# Altium PCB PCB1.PcbDoc
Units mm, origin at the board's own origin, x right, y up, seen from the top; angles counter-clockwise.
Board outline 79.25 x 62 mm, 4 copper layers (L1(signal), l2(GND), l3(GND), L4(signal)), stack 1.57 mm thick; 47 components, 30 nets, 186 pads, 68 vias.
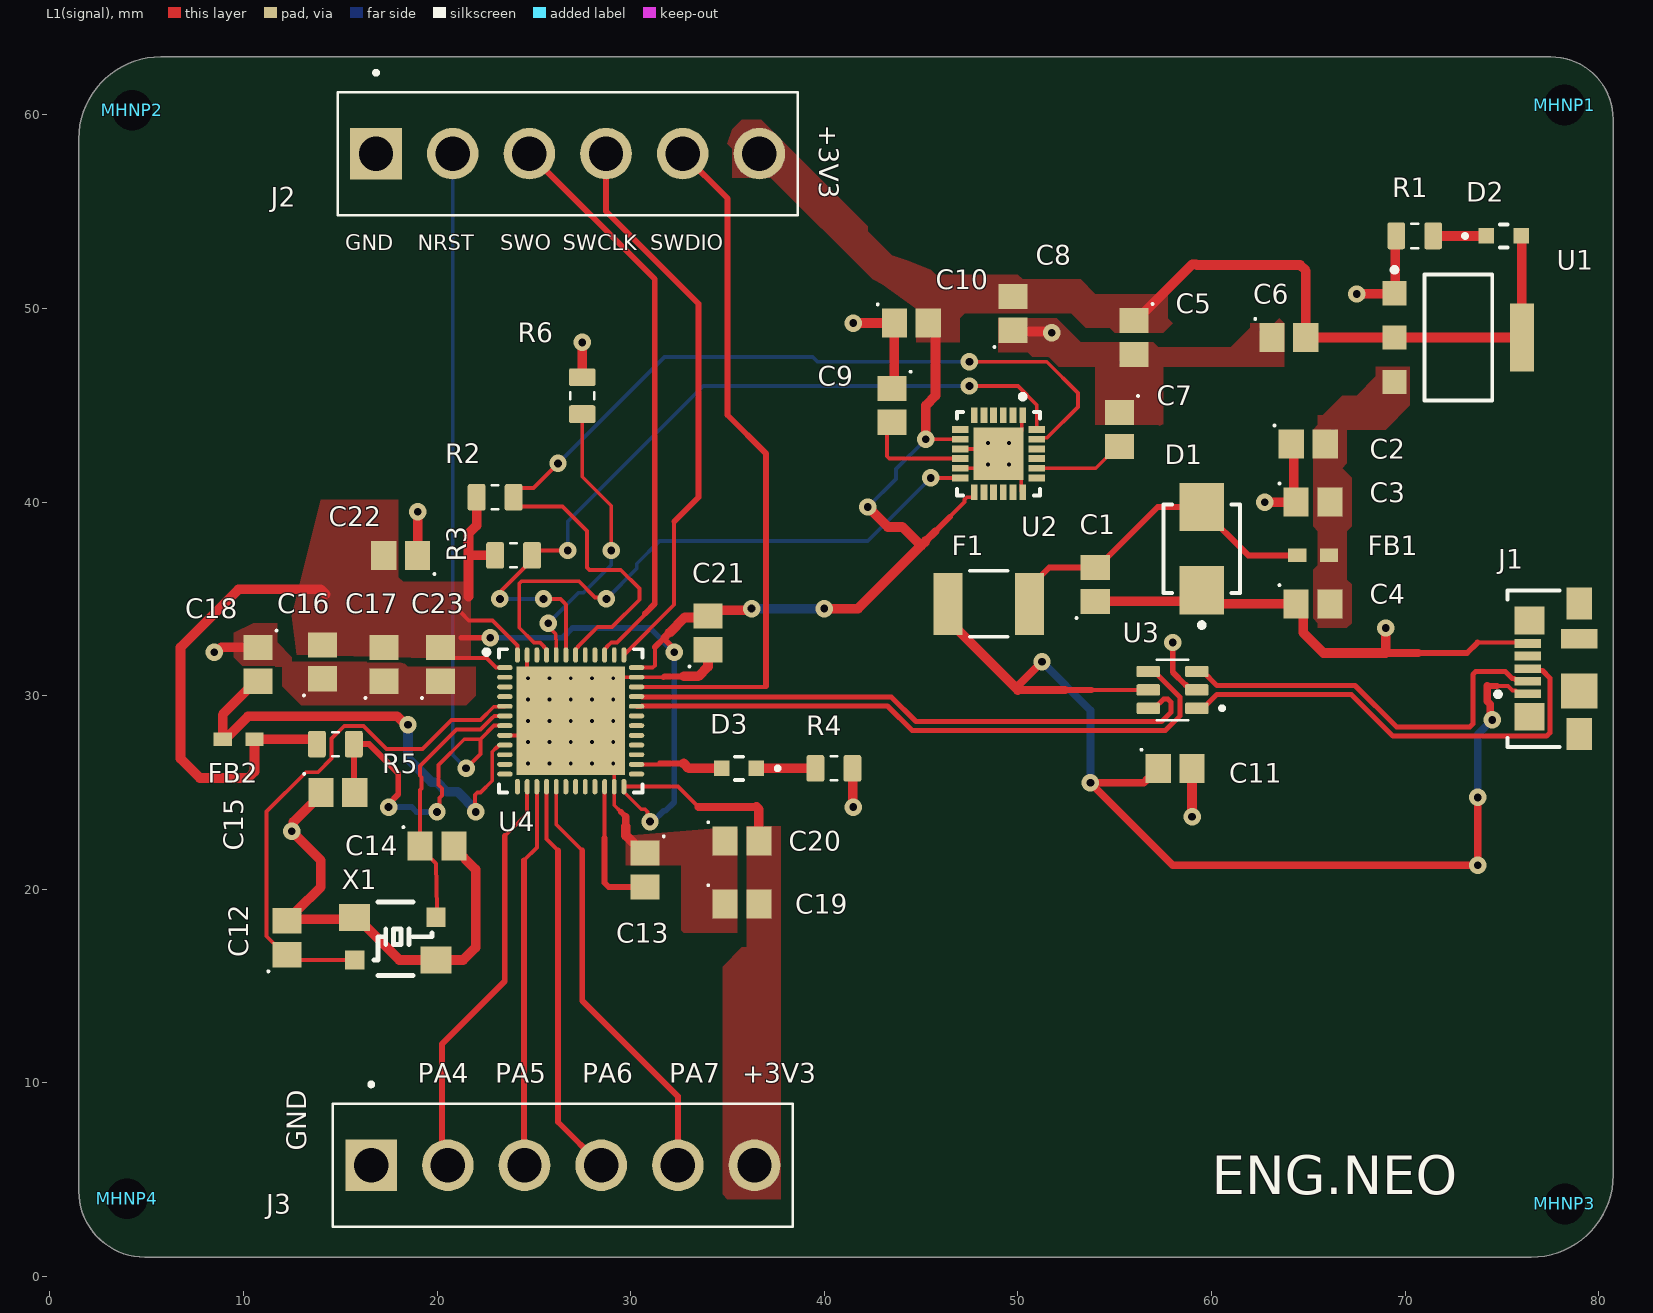
[diagram p0: L1(signal) view]
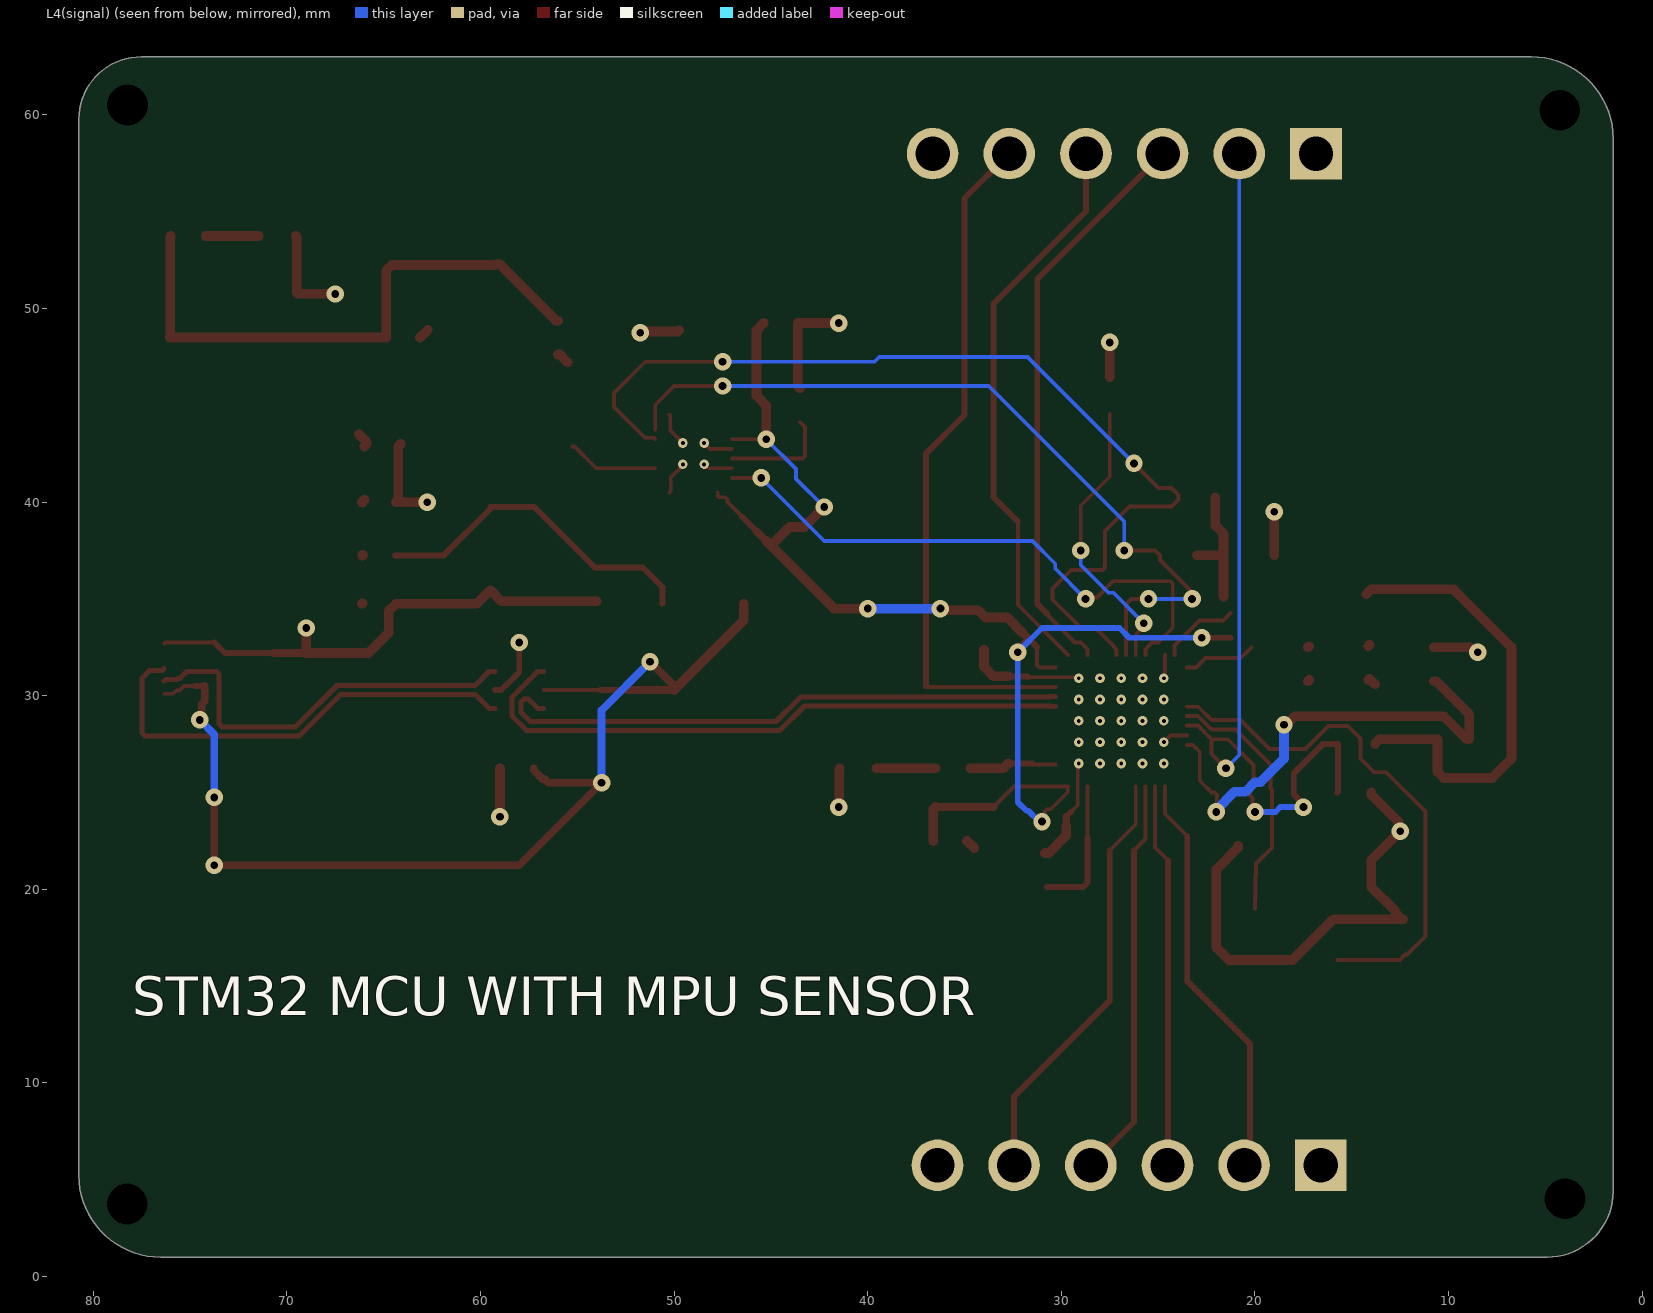
[diagram p1: L4(signal) view, seen from below]
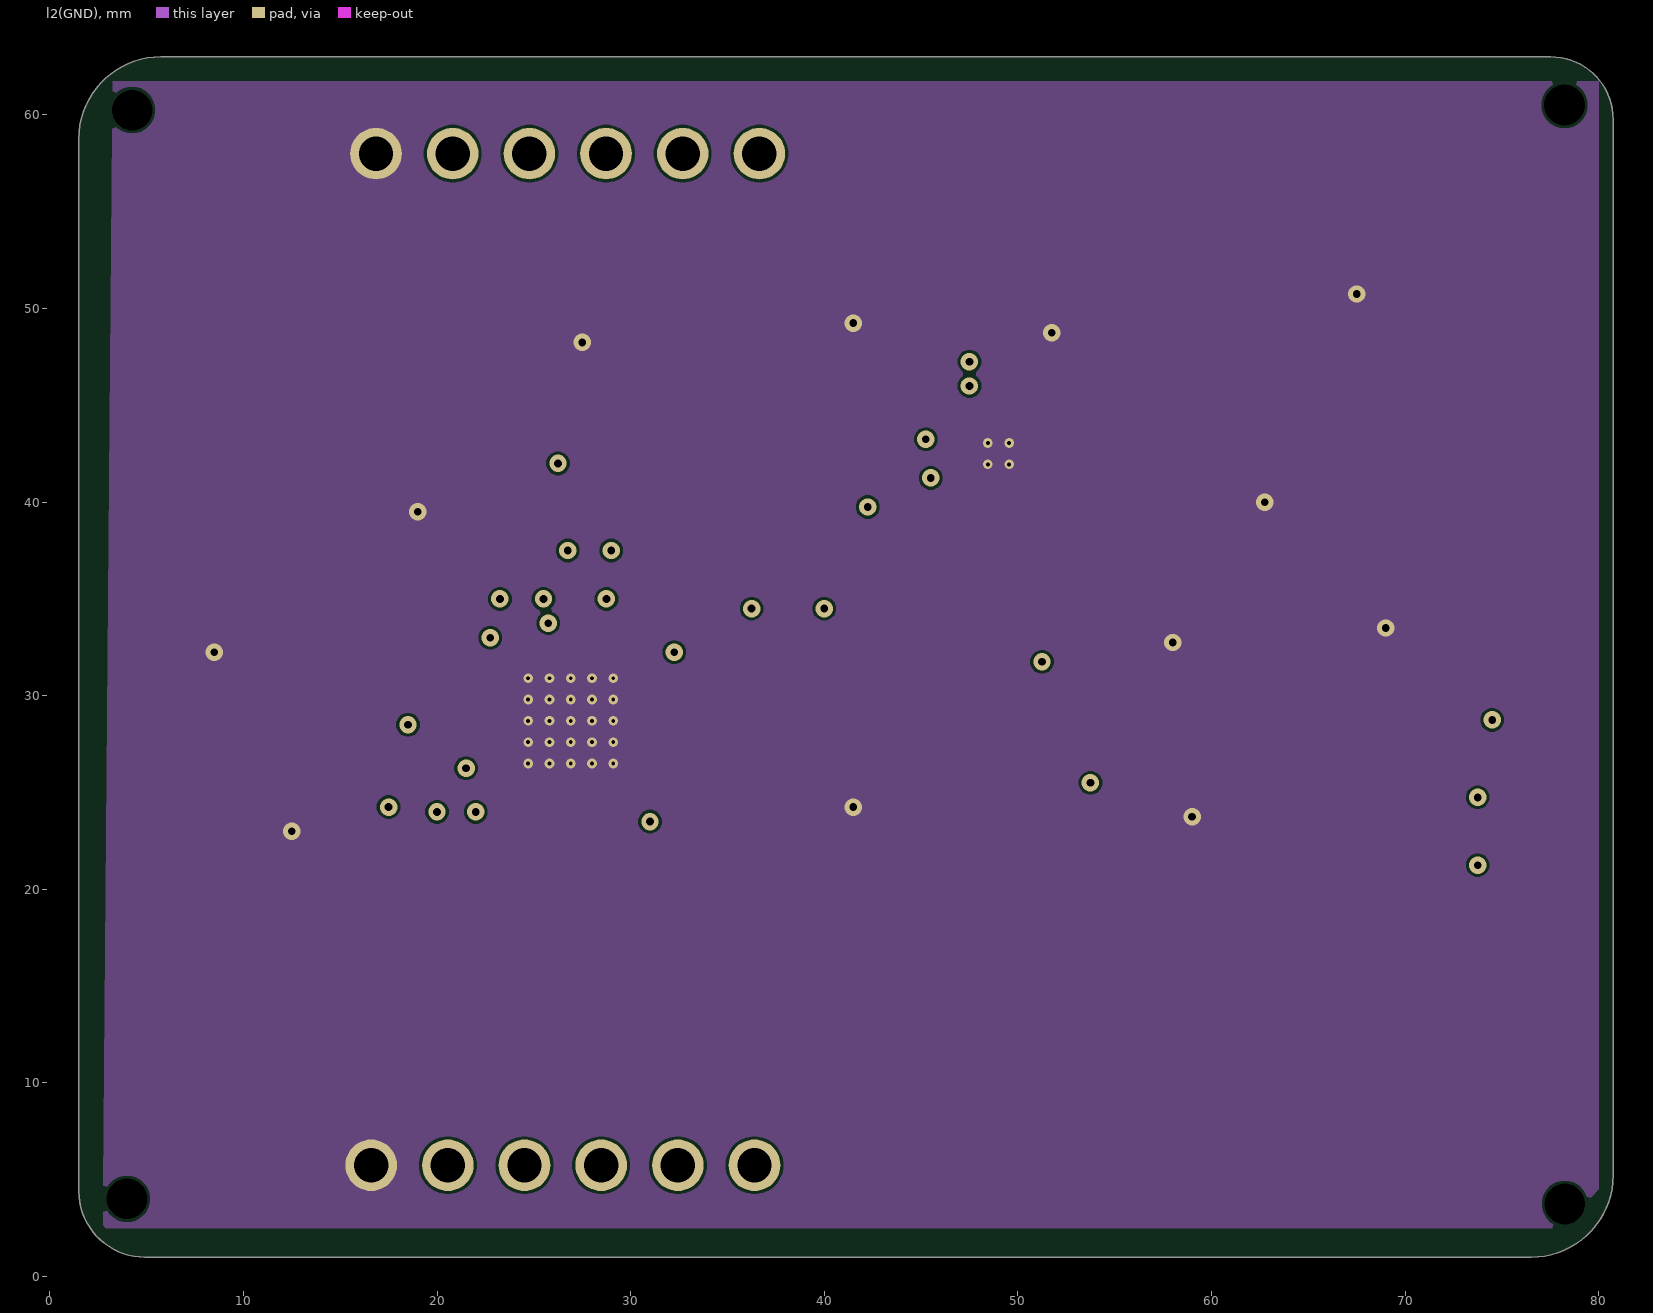
[diagram p2: l2(GND)]
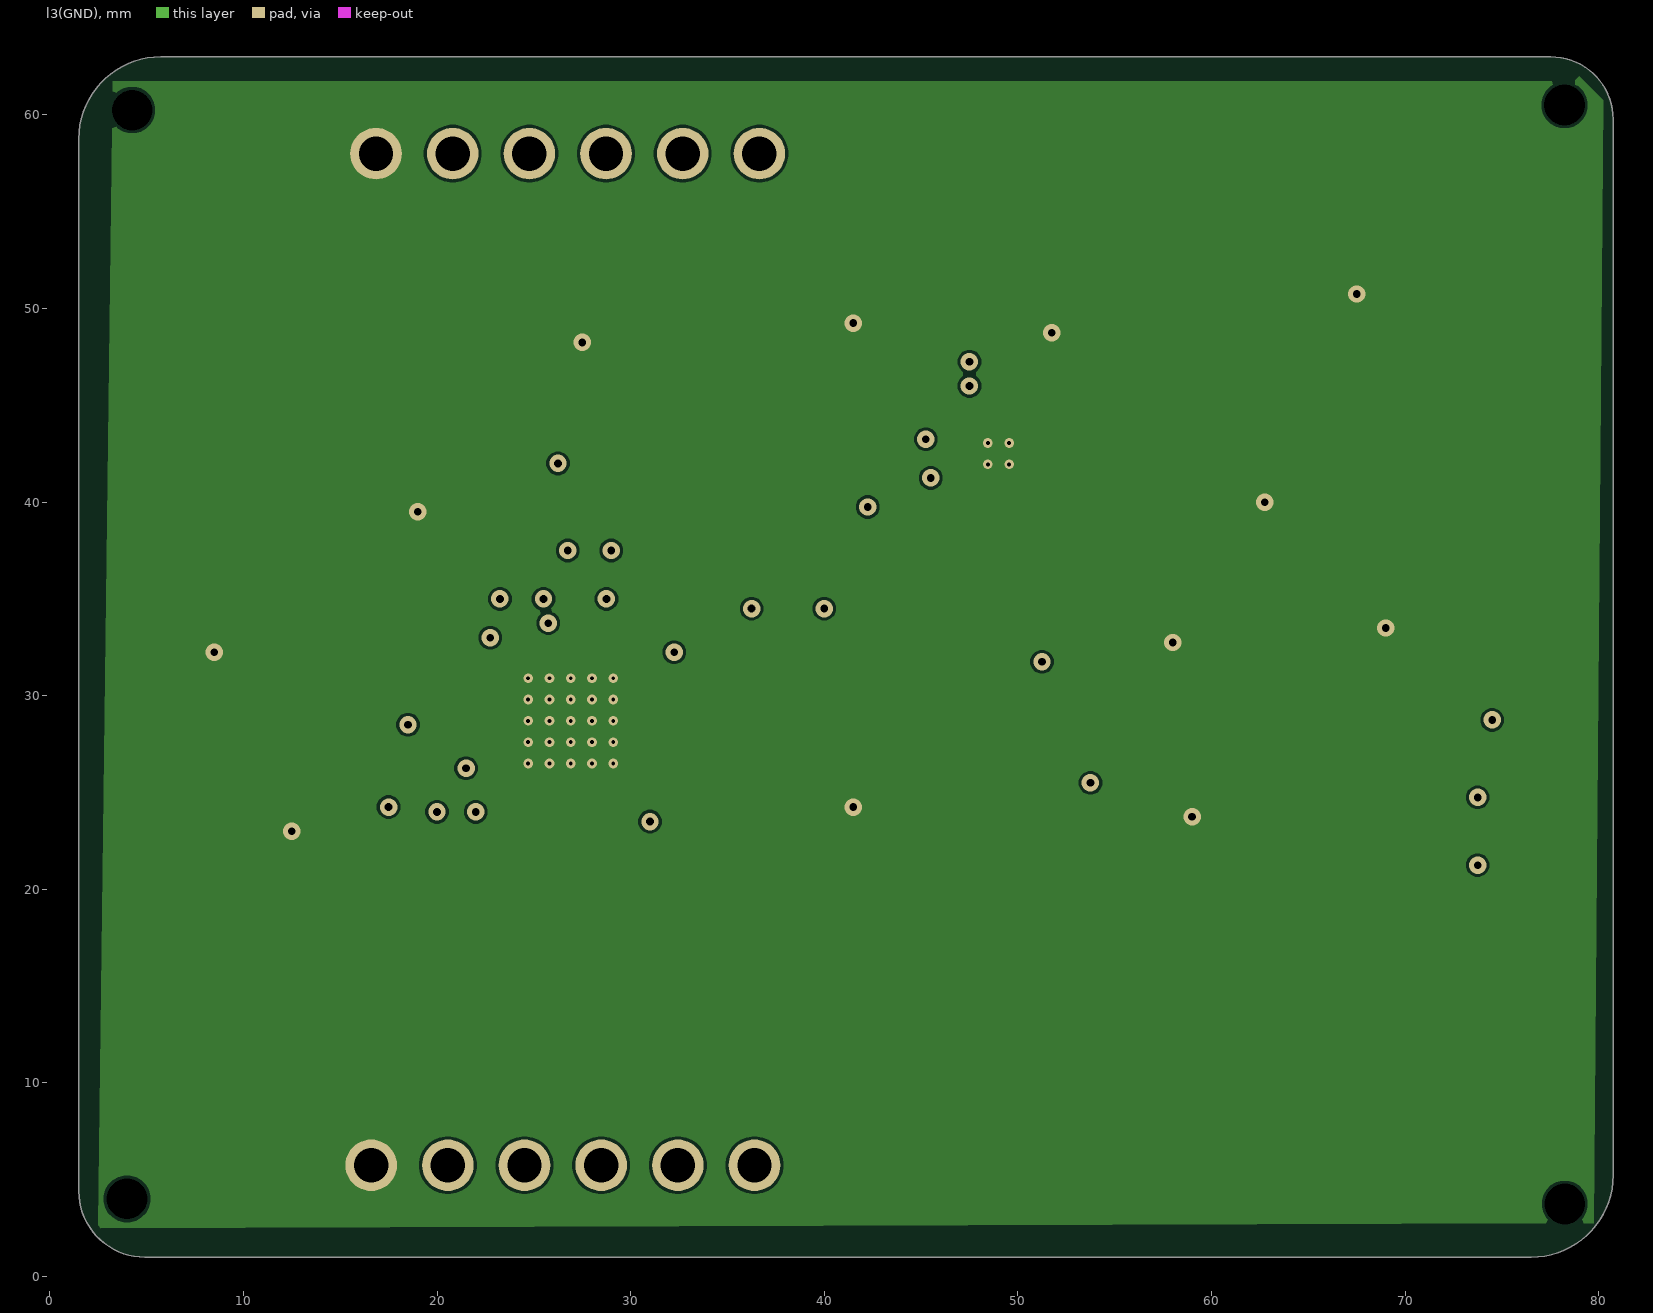
[diagram p3: l3(GND)]
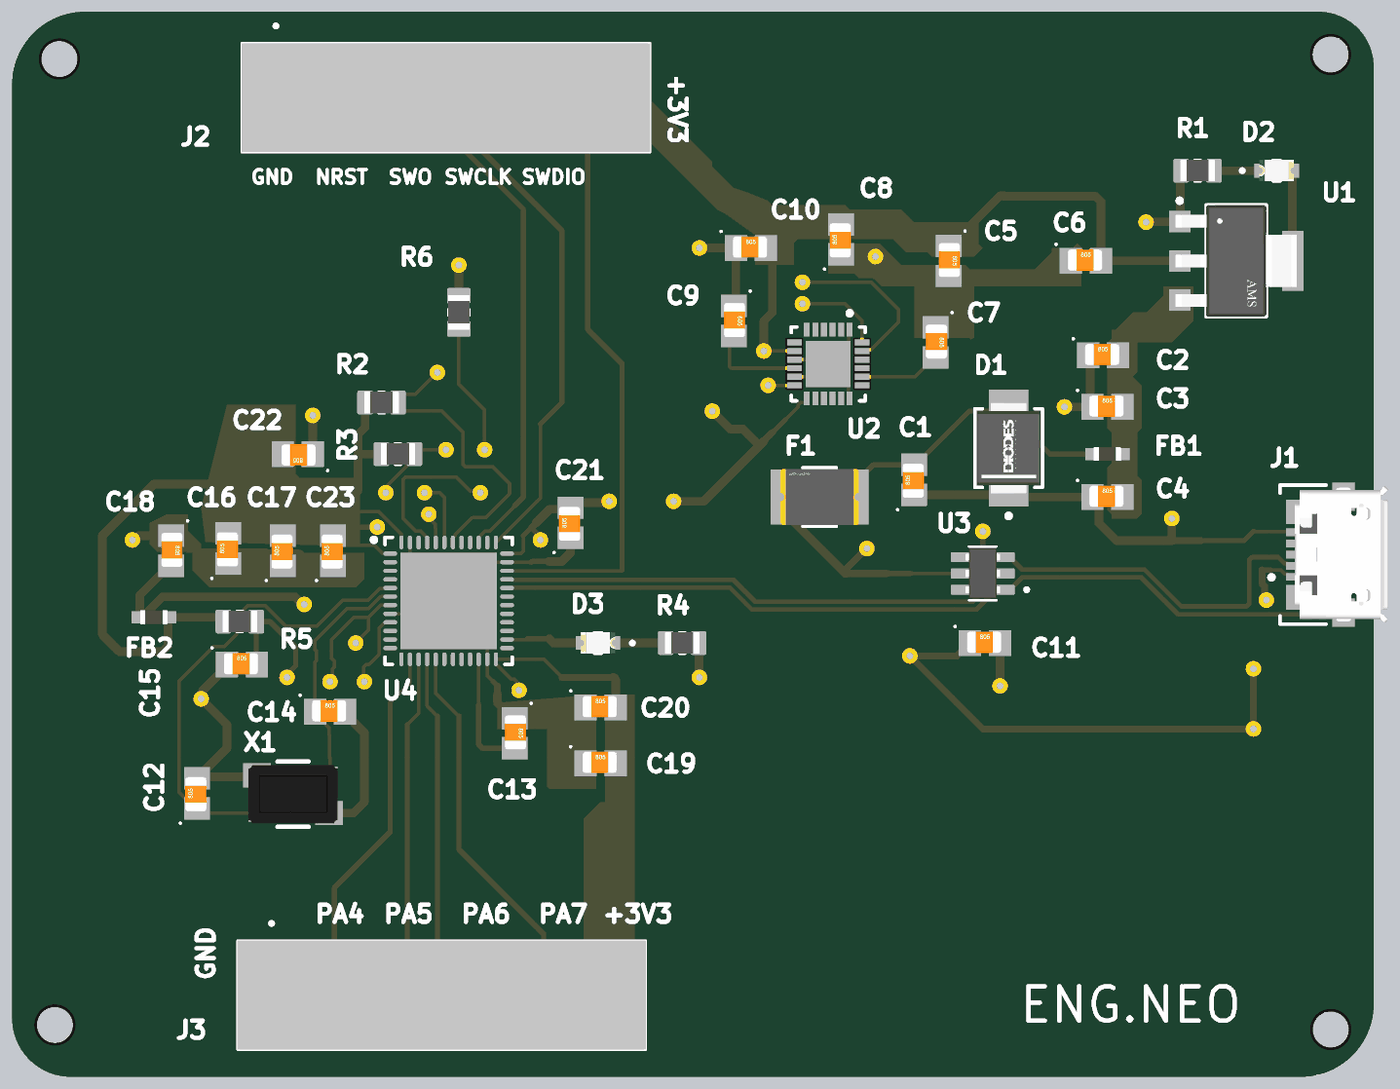
[diagram p4: 3D render of the assembled board from above, using the file's embedded part models]

## Layer stack, top to bottom
Top Solder: solder mask 0.0254, SM-001, Dk 4
L1(signal): signal copper 0.035
Dielectric 1: prepreg 0.2, PP-017, Dk 4.6
l2(GND): signal copper 0.0175
Dielectric 3: core 1.065, Core-039, Dk 4.6
l3(GND): signal copper 0.0175
Dielectric 5: prepreg 0.2, PP-017, Dk 4.6
L4(signal): signal copper 0.035
Bottom Solder: solder mask 0.0254, SM-001, Dk 4

## Board outline
1.5,4.414 ccw(c4.914,4.414) 4.914,1 5.75,1 76.518,1 ccw(c76.518,5.232) 80.75,5.232 80.75,59.775 ccw(c77.525,59.775) 77.525,63 5.732,63 ccw(c5.732,58.768) 1.5,58.768

## Design rules (kind name [scope] priority, off if disabled: settings)
Clearance [All] p1: gap=0.15 ignorepadtopadclearanceinfootprint=TRUE
DiffPairsRouting [All] p1: maxlimit=0.254 minlimit=0.203 mostfreqgap=0.254 toplayer_maxgap=0.203 toplayer_prefgap=0.203 toplayer_minwidth=0.26 toplayer_maxwidth=0.26 toplayer_prefwidth=0.26 bottomlayer_maxgap=0.203 bottomlayer_prefgap=0.203 bottomlayer_minwidth=0.26 bottomlayer_maxwidth=0.26 bottomlayer_prefwidth=0.26 impedanceprofiledriven=TRUE impedanceprofileid={50B02AB9-6795-4134-819A-C436B6F8A8B1} impedanceprofilevalue=90.000000 maxuncoupledlength=12.7
MinimumSolderMaskSliver [All] p1: minsoldermaskwidth=0.1
PolygonConnect [All] p1: connectstyle=Direct reliefconductorwidth=0.254 reliefentries=4 polygonreliefangle="90 Angle" airgapwidth=0.254
RoutingVias [All] p1: holewidth=0.3 width=0.7 viastyle="Through Hole" minholewidth=0.25 minwidth=0.55 maxholewidth=0.4 maxwidth=0.9
SMDNeckDown [All] p1: percent=80.000
SilkToSolderMaskClearance [IsPad] p1: minsilkscreentomaskgap=0.15 clearancetoexposedcopper=TRUE
SolderMaskExpansion [All] p1: expansion=0 istentingtop=FALSE
SupplyNets "Schematic Supply Nets_4" [InNet('VBUS')] p1: voltage=0.000
SupplyNets "Schematic Supply Nets_3" [InNet('+3V3')] p2: voltage=0.000
SupplyNets "Schematic Supply Nets_2" [InNet('+5V')] p3: voltage=0.000
SupplyNets "Schematic Supply Nets_1" [InNet('GND')] p4: voltage=0.000
SupplyNets "Schematic Supply Nets" [InNet('+3V3A')] p5: voltage=0.000
UnRoutedNet [All] p1: checkbadconnections=TRUE
Width [All] p1: maxlimit=1 minlimit=0.2 preferedwidth=0.3
26 further rules are at their usual default settings.

## Classes and differential pairs
differential pair class DIFF_USB_IN: USB_IN USB_OUT
differential pair USB_OUT: +USB_OUT_P -USB_OUT_N
differential pair USB_IN: +USB_IN_P -USB_IN_N

## Components (designator, comment, footprint, x,y, rotation, side; value= is the part's Value field where it differs from the comment)
C1 "100nF Ceramic Multilayer Capacitor_1" CAPCP2012X09N 54,35.75 r90 top
C2 "100nF Ceramic Multilayer Capacitor_1" CAPCP2012X09N 65,43 r0 top
C3 "100nF Ceramic Multilayer Capacitor_1" CAPCP2012X09N 65.25,40 r0 top
C4 "100nF Ceramic Multilayer Capacitor_1" CAPCP2012X09N 65.25,34.75 r0 top
C5 "100nF Ceramic Multilayer Capacitor_1" CAPCP2012X09N 56,48.5 r270 top
C6 "100nF Ceramic Multilayer Capacitor_1" CAPCP2012X09N 64,48.5 r0 top
C7 "100nF Ceramic Multilayer Capacitor_1" CAPCP2012X09N 55.25,43.75 r270 top
C8 "100nF Ceramic Multilayer Capacitor_1" CAPCP2012X09N 49.75,49.75 r90 top
C9 "100nF Ceramic Multilayer Capacitor_1" CAPCP2012X09N 43.5,45 r270 top
C10 "100nF Ceramic Multilayer Capacitor_1" CAPCP2012X09N 44.5,49.25 r0 top
C11 "100nF Ceramic Multilayer Capacitor_1" CAPCP2012X09N 58.125,26.25 r0 top
C12 "100nF Ceramic Multilayer Capacitor_1" CAPCP2012X09N 12.25,17.5 r90 top
C13 "100nF Ceramic Multilayer Capacitor_1" CAPCP2012X09N 30.75,21 r270 top
C14 "100nF Ceramic Multilayer Capacitor_1" CAPCP2012X09N 20,22.25 r0 top
C15 "100nF Ceramic Multilayer Capacitor_1" CAPCP2012X09N 14.875,25 r0 top
C16 "100nF Ceramic Multilayer Capacitor_1" CAPCP2012X09N 14.087,31.752 r90 top
C17 "100nF Ceramic Multilayer Capacitor_1" CAPCP2012X09N 17.262,31.625 r90 top
C18 "100nF Ceramic Multilayer Capacitor_1" CAPCP2012X09N 10.75,31.625 r270 top
C19 "100nF Ceramic Multilayer Capacitor_1" CAPCP2012X09N 35.75,19.25 r0 top
C20 "100nF Ceramic Multilayer Capacitor_1" CAPCP2012X09N 35.75,22.5 r0 top
C21 "100nF Ceramic Multilayer Capacitor_1" CAPCP2012X09N 34,33.25 r90 top
C22 "100nF Ceramic Multilayer Capacitor_1" CAPCP2012X09N 18.125,37.25 r180 top
C23 "100nF Ceramic Multilayer Capacitor_1" CAPCP2012X09N 20.183,31.625 r90 top
D1 "SMBJ5.0A-13-F" FP-SMB-MFG 59.5,37.6 r90 top
D2 "GREEN" LEDC2012X70N 75.1,53.75 r0 top
D3 "GREEN" LEDC2012X70N 35.6,26.25 r180 top
F1 "MF-MSMF050-2" FP-MF-MSMF050-2-MFG 48.5,34.75 r0 top value=0.15-1Ω
FB1 "120R" "WE-CBF HF_0603_HC" 65.25,37.25 r0 top
FB2 "120R" "WE-CBF HF_0603_HC" 9.75,27.75 r180 top
J1 "473460001" FP-473460001-MFG 78.65,31.4 r90 top
J2 "640383-6" TE_640383-6 26.75,58 r0 top
J3 "640383-6" TE_640383-6 26.5,5.75 r0 top
MHNP1 "Mounting hole non plated 3.2mm" MHNP3P2MM 78.25,60.5 r90 top
MHNP2 "Mounting hole non plated 3.2mm" MHNP3P2MM 4.261,60.239 r90 top
MHNP3 "Mounting hole non plated 3.2mm" MHNP3P2MM 78.261,3.739 r90 top
MHNP4 "Mounting hole non plated 3.2mm" MHNP3P2MM 4,4 r90 top
R1 "1k" RESC2012X60N 70.5,53.75 r180 top
R2 "2k2" RESC2012X60N 23,40.25 r180 top
R3 "2k2" RESC2012X60N 23.955,37.25 r180 top
R4 "1k" RESC2012X60N 40.5,26.25 r0 top
R5 "10k" RESC2012X60N 14.75,27.5 r180 top
R6 "10k" RESC2012X60N 27.5,45.5 r270 top
U1 "AMS1117-3.3" FP-AMS1117-IPC_C 72.75,48.5 r0 top
U2 "MPU-6050" IS-QFN-24_V 49,42.5 r270 top
U3 "USBLC6-2SC6" SOT95P280X145-6N 57.995,30.3 r180 top
U4 "STM32F411CEU6" STM-UFQFPN48_L 26.906,28.704 r0 top
X1 "Aker 16MHz Crystal SMT" "Aker S5C Crystal" 15.75,16.35 r180 top value=24MHz

## Footprints (in the part's own frame and the unit in brackets; to place one, negate y for a bottom-side part, rotate by r counter-clockwise, add the part's x,y. Pads: shape width x height; smd on the part's side, far side on the other; paste and mask are expansions set on the pad)
"Aker S5C Crystal" [mm]
  rect 1x1 smd: 1(0,0) 4(-4.2,-2.2)
  rect 1.6x1.4 smd: 2(-4.2,0) 3(0,-2.2)
  round 0.254 on Top Overlay: 5(-3,-2.4)
  silkscreen extent -4,-3 -1,0.8, body extent -4.7,-2.8 0.5,0.6, height 1
CAPCP2012X09N [mm] "Chip Capacitor, 2-Leads, Body 2.00x1.25mm, IPC Medium Density"
  rect 1.3x1.5 smd: 1(-0.875,0) 2(0.875,0)
  silkscreen extent -1.79,0.91 -1.69,1.01, body extent -1.05,-0.57 0.95,0.68, height 0.78
FP-473460001-MFG [mm]
  rect 0.45x1.38 smd paste+0 mask+0: 1(-1.3,2.31) 2(-0.65,2.31) 3(0,2.31) 4(0.65,2.31) 5(1.3,2.31)
  rect 1.425x1.55 smd paste+0 mask+0: 6(-2.488,2.225) 7(2.487,2.225)
  rect 1.65x1.3 smd paste+0 mask+0: 8(-3.375,-0.35) 11(3.375,-0.35)
  rect 1.8x1.9 smd paste+0 mask+0: 9(-1.15,-0.35)
  rect 1x1.9 smd paste+0 mask+0: 10(1.55,-0.35)
  silkscreen extent -4.04,0.68 4.05,3.97, body extent -4.3,-2.48 4.3,3.45, height 0.25
FP-AMS1117-IPC_C [mm]
  rect 1.25x1.25 smd paste+0 mask+0: 1(-3.295,2.29) 2(-3.295,0) 3(-3.295,-2.29)
  rect 1.25x3.5 smd paste+0 mask+0: 4(3.295,0)
  silkscreen extent -3.42,-3.25 1.75,3.62, body extent -3.9,-3.35 3.9,3.35, height 0.25
FP-MF-MSMF050-2-MFG [mm]
  rect 1.5x3.2 smd paste+0 mask+0: 1(-2.1,0) 2(2.1,0)
  silkscreen extent -0.97,-1.7 0.97,1.71, body extent -2.95,-1.81 2.95,1.81, height 0.25
FP-SMB-MFG [mm]
  rect 2.5x2.3 smd paste+0 mask+0: 1(-2.15,0) 2(2.15,0)
  silkscreen extent -4.07,-1.97 2.28,1.97, body extent -3.5,-2.07 3.5,2.07, height 0.25
IS-QFN-24_V [mm] "QFN, 24-Leads, Body 4x4mm, Pitch 0.5mm, Thermal Pad 2.7x2.6mm"
  rect 0.8x0.35 smd: 1(-2,1.25) 2(-2,0.75) 3(-2,0.25) 4(-2,-0.25) 5(-2,-0.75) 6(-2,-1.25) 13(2,-1.25) 14(2,-0.75) 15(2,-0.25) 16(2,0.25) 17(2,0.75) 18(2,1.25)
  rect 0.35x0.85 smd mask+0.102: 7(-1.25,-1.975) 8(-0.75,-1.975) 9(-0.25,-1.975) 10(0.25,-1.975) 11(0.75,-1.975) 12(1.25,-1.975) 19(1.25,1.975) 20(0.75,1.975) 21(0.25,1.975) 22(-0.25,1.975) 23(-0.75,1.975) 24(-1.25,1.975)
  rect 2.7x2.6 smd: 25(0,0)
  silkscreen extent -3.07,-2.15 2.15,2.15, body extent -2,-2 2,2, height 0.95
LEDC2012X70N [mm]
  rect 0.8x0.8 smd: A(0.9,0) C(-0.9,0)
  silkscreen extent -2.1,-0.6 0.2,0.6, body extent -1,-0.63 1,0.63, height 0.7
MHNP3P2MM [mm] "Mounting hole non plated 3.2mm"
  round 0 hole 2.1 unplated mask+1.2: MHNP3P2MM(0.011,0.011)
RESC2012X60N [mm]
  rrect25% 0.92x1.38 smd: 1(-0.955,0) 2(0.955,0)
  silkscreen extent -0.18,-0.63 0.17,0.63, body extent -1,-0.63 1,0.63, height 0.58
SOT95P280X145-6N [mm]
  rrect25% 1.21x0.59 smd: 1(-1.255,0.95) 2(-1.255,0) 3(-1.255,-0.95) 4(1.255,-0.95) 5(1.255,0) 6(1.255,0.95)
  silkscreen extent -2.66,-1.56 0.81,1.57, body extent -1.4,-1.46 1.4,1.46, height 0.4
STM-UFQFPN48_L [mm] "QFN, 48-Leads, Body 7.1x7.1mm, Pitch 0.5mm, Thermal Pad 5.6x5.6mm, IPC High Density"
  oval 0.8x0.25 smd: 1(-3.4,2.75) 2(-3.4,2.25) 3(-3.4,1.75) 4(-3.4,1.25) 5(-3.4,0.75) 6(-3.4,0.25) 7(-3.4,-0.25) 8(-3.4,-0.75) 9(-3.4,-1.25) 10(-3.4,-1.75) 11(-3.4,-2.25) 12(-3.4,-2.75) 25(3.4,-2.75) 26(3.4,-2.25) 27(3.4,-1.75) 28(3.4,-1.25) 29(3.4,-0.75) 30(3.4,-0.25) 31(3.4,0.25) 32(3.4,0.75) 33(3.4,1.25) 34(3.4,1.75) 35(3.4,2.25) 36(3.4,2.75)
  oval 0.25x0.8 smd: 13(-2.75,-3.4) 14(-2.25,-3.4) 15(-1.75,-3.4) 16(-1.25,-3.4) 17(-0.75,-3.4) 18(-0.25,-3.4) 19(0.25,-3.4) 20(0.75,-3.4) 21(1.25,-3.4) 22(1.75,-3.4) 23(2.25,-3.4) 24(2.75,-3.4) 37(2.75,3.4) 38(2.25,3.4) 39(1.75,3.4) 40(1.25,3.4) 41(0.75,3.4) 42(0.25,3.4) 43(-0.25,3.4) 44(-0.75,3.4) 45(-1.25,3.4) 46(-1.75,3.4) 47(-2.25,3.4) 48(-2.75,3.4)
  rect 5.6x5.6 smd: 49(0,0)
  silkscreen extent -4.47,-3.7 3.7,3.7, body extent -3.55,-3.55 3.55,3.55, height 0.6
TE_640383-6 [mil]
  rect 105x105 / inner round 105 / far side rect 105x105 hole 70 mask+4.02: 1(-389.76,0)
  round 105 hole 70 mask+4.02: 2(-233.86,0) 3(-77.95,0) 4(77.95,0) 5(233.86,0) 6(389.76,0)
  silkscreen extent -468,-125 468,168, body extent -468,-125 468,125, height 498
"WE-CBF HF_0603_HC" [mm] "SMD EMI Suppression Ferrite  Bead, body 1.60x0.80mm"
  rect 0.95x0.7 smd: 1(-0.825,0) 2(0.825,0)
  body extent -0.8,-0.4 0.8,0.4, height 0.8

## Part data
C1 C2 C16 C17: "AVX 0805 Standard 100nF Ceramic Multilayer Capacitor, 50 V dc X7R Dielectric ±10% SMD", Capacitance=1u, Manufacturer=AVX, Package=0805, Voltage=50V, Creator="Ritesh Kanjee", Datasheet URL=http://za.rs-online.com/web/p/ceramic-multilayer-capacitors/4646688/, Date Created="18 February 2015", RS Stock No.=464-6688
C3 C18: "AVX 0805 Standard 100nF Ceramic Multilayer Capacitor, 50 V dc X7R Dielectric ±10% SMD", Capacitance=10u, Manufacturer=AVX, Package=0805, Voltage=50V, Creator="Ritesh Kanjee", Datasheet URL=http://za.rs-online.com/web/p/ceramic-multilayer-capacitors/4646688/, Date Created="18 February 2015", RS Stock No.=464-6688
C4 C5 C11 C15 C20 C21 C22 C23: "AVX 0805 Standard 100nF Ceramic Multilayer Capacitor, 50 V dc X7R Dielectric ±10% SMD", Capacitance=100n, Manufacturer=AVX, Package=0805, Voltage=50V, Creator="Ritesh Kanjee", Datasheet URL=http://za.rs-online.com/web/p/ceramic-multilayer-capacitors/4646688/, Date Created="18 February 2015", RS Stock No.=464-6688
C6: "AVX 0805 Standard 100nF Ceramic Multilayer Capacitor, 50 V dc X7R Dielectric ±10% SMD", Capacitance=22u, Manufacturer=AVX, Package=0805, Voltage=50V, Creator="Ritesh Kanjee", Datasheet URL=http://za.rs-online.com/web/p/ceramic-multilayer-capacitors/4646688/, Date Created="18 February 2015", RS Stock No.=464-6688
C7 C13 C19: "AVX 0805 Standard 100nF Ceramic Multilayer Capacitor, 50 V dc X7R Dielectric ±10% SMD", Capacitance=2u2, Manufacturer=AVX, Package=0805, Voltage=50V, Creator="Ritesh Kanjee", Datasheet URL=http://za.rs-online.com/web/p/ceramic-multilayer-capacitors/4646688/, Date Created="18 February 2015", RS Stock No.=464-6688
C8: "AVX 0805 Standard 100nF Ceramic Multilayer Capacitor, 50 V dc X7R Dielectric ±10% SMD", Capacitance=10n, Manufacturer=AVX, Package=0805, Voltage=50V, Creator="Ritesh Kanjee", Datasheet URL=http://za.rs-online.com/web/p/ceramic-multilayer-capacitors/4646688/, Date Created="18 February 2015", RS Stock No.=464-6688
C9 C10: "AVX 0805 Standard 100nF Ceramic Multilayer Capacitor, 50 V dc X7R Dielectric ±10% SMD", Capacitance=0u1, Manufacturer=AVX, Package=0805, Voltage=50V, Creator="Ritesh Kanjee", Datasheet URL=http://za.rs-online.com/web/p/ceramic-multilayer-capacitors/4646688/, Date Created="18 February 2015", RS Stock No.=464-6688
C12 C14: "AVX 0805 Standard 100nF Ceramic Multilayer Capacitor, 50 V dc X7R Dielectric ±10% SMD", Capacitance=10p, Manufacturer=AVX, Package=0805, Voltage=50V, Creator="Ritesh Kanjee", Datasheet URL=http://za.rs-online.com/web/p/ceramic-multilayer-capacitors/4646688/, Date Created="18 February 2015", RS Stock No.=464-6688
D1: library part CMP-12828-000017-1, "TVS DIODE 5V 9.2V SMB", Breakdown Voltage=6.4V, Clamping Voltage=9.2V, Manufacturer="Diodes Inc", Max Junction Temp=+150°C, Package=SMB, Peak Pulse Current=65.2A, Peak Pulse Power=600W, Reverse Standoff Voltage=5V, Temperature="-55°C to +150°C", Temperature Range Low=-55°C, Automotive=No, Category=Diode, ComponentLink2Description=Datasheet, ComponentLink2URL=https://www.diodes.com/assets/Datasheets/ds19002.pdf, Device Class L1="Circuit Protection", Device Class L2="TVS Diodes", Device Class L3=unset, Digikey Description="TVS DIODE 5V 9.2V SMB", Direction=Unidirectional, Footprint Url=https://www.diodes.com/assets/Package-Files/SMB.pdf, Height=2.5mm, Lead Free=Yes, Manufacturer Part Number=SMBJ5.0A-13-F, Mouser Description="TVS Diodes - Transient Voltage Suppressors 600W 5.0V", Number Of Channels=1, Octopart=https://octopart.com/smbj5.0a-13-f-diodes+inc.-350946, RoHS=TRUE, Standoff Height=0.05mm, Temperature Range High=+150°C
D2 D3: library part 597-3305-607F, "LED Uni-Color Green 4-Pin Chip 0805 T/R", Package=None, Availability=Unavailable, MP=597-3305-607F, Price=None
F1: library part CMP-2100-03653-2, "PTC RESET FUSE 15V 500MA 1812", Ambient Temperature Range High=+85°C, Ambient Temperature Range Low=-40°C, Current Rating=100A, Hold Current=0.5A, Manufacturer=Bourns, Package=1812, Resistance=0.15-1Ω, Temperature="-40°C to +85°C", Trip Current=1A, Voltage Rating=15V, Automotive=Yes, Automotive Grade="Grade 3", Category=Fuse, ComponentLink2Description=Datasheet, ComponentLink2URL=http://www.bourns.com/docs/Product-Datasheets/mfmsmf.pdf, Device Class L1="Circuit Protection", Device Class L2="PTC Resettable Fuses", Device Class L3=unset, Digikey Description="PTC RESET FUSE 15V 500MA 1812", Height=0.85mm, Lead Free=Yes, Manufacturer Part Number=MF-MSMF050-2, Mouser Description="PTC Resettable Fuse 0.5A(hold) 1A(trip) 15V 100A 0.8W 0.15s 0.15Ohm SMD Solder Pad 1812 T/R", Octopart=https://octopart.com/mf-msmf050-2-bourns-28047, RoHS=TRUE, Temperature Range High=+85°C, Temperature Range Low=-40°C, Trip Time=0.15s
FB1 FB2: library part CMP-0220-00101-3, "Ferrite Bead (emi Suppression), 1.6X0.8X0.8MM (0603), 600O Impedance At 100 Mhz", Case Code (Imperial)=0603, Case Code (Metric)=1608, Case/Package=SMD/SMT, Current Rating=400mA, DC Resistance (DCR)=220mΩ, Max Current Rating=500mA, Max Operating Temperature=125°C, Min Operating Temperature=-55°C, Resistance=350mΩ, Test Frequency=100MHz, Tolerance=25%, Core Material=Ferrite, Depth=800µm, Height=800µm, Impedance=600Ω, Lead Free="Lead Free", Length=1.6mm, Max DC Current=500mA, Mount="Surface Mount", Number of Lines=1, Number of Pins=2, REACH SVHC=Unknown, RoHS=Compliant, Termination=SMD/SMT, Width=800µm
J1: library part CMP-2000-05246-2, "CONN RCPT USB2.0 MICRO B SMD R/A", Current Rating=1.8A, Manufacturer=Molex, Package=0, Temperature="-30°C to +85°C", Temperature Range High=+85°C, Temperature Range Low=-30°C, Voltage Rating=30V, Automotive=No, Category=Conn, ComponentLink2Description=Datasheet, ComponentLink2URL=https://www.molex.com/webdocs/datasheets/pdf/en-us/0473460001_IO_CONNECTORS.pdf, Conn Orientation="Right Angle", Contact Material=Gold,Nickel, Device Class L1=Connectors, Device Class L2="USB Connectors", Device Class L3=unset, Digikey Description="CONN RCPT USB2.0 MICRO B SMD R/A", Footprint Url=https://www.molex.com/pdm_docs/sd/473460001_sd.pdf, Height=2.945mm, Is Female=yes, Lead Free=Yes, Manufacturer Part Number=473460001, Number Of Contacts=5, Octopart=https://octopart.com/47346-0001-molex-7164928, Pitch=0.65mm, RoHS=TRUE, Shielding=true, Usb Standard="USB 2.0"
J2 J3: "Header, Conn,Interconnect System,PCB Plug,6 Cont,Solder,MTA-156 Series,Straight", Package=None, Check_prices=https://www.snapeda.com/parts/640383-6/TE+Connectivity+AMP+Connectors/view-part/?ref=eda, EU_RoHS_Compliance=Compliant, MF="TE Connectivity", MP=640383-6, SnapEDA_Link=https://www.snapeda.com/parts/640383-6/TE+Connectivity+AMP+Connectors/view-part/?ref=snap
MHNP1 MHNP2 MHNP3 MHNP4: library part MHNP3P2MM, "Mounting hole non plated 3.2mm drill hole"
R1 R2 R3 R4 R5 R6: library part RC0805FR-102K7L, Package=None, Availability=Unavailable, MP=RC0805FR-102K7L, Price=None
U1: library part CMP-209535-000001-1, "LDO Voltage Regulators 1A, 3.3V", Dropout Voltage=1.1V, Manufacturer="Advanced Monolithic Systems", Max Junction Temp=+125°C, Max Power Dissipation=1.2W, Max Supply Voltage=15V, Nominal Supply Current=5mA, Output Current=1A, Output Voltage=3.3V, Package=AMS1117, Temperature="-40°C to +125°C", Temperature Range Low=-40°C, Automotive=No, Category=IC, ComponentLink2Description=Datasheet, ComponentLink2URL=http://www.advanced-monolithic.com/pdf/ds1117.pdf, Device Class L1="Integrated Circuits (ICs)", Device Class L2="Power Management ICs", Device Class L3="Voltage Regulators - Linear", Height=1.8mm, Ipc Land Pattern Name=SOT229P700X180-4, Lead Free=Yes, Manufacturer Part Number=AMS1117-3.3, Number Of Outputs=1, Octopart=https://octopart.com/ams1117-3.3-advanced+monolithic+systems-25899300, Output Type=Fixed, RoHS=TRUE, Standoff Height=0.64mm, Temperature Range High=+125°C
U2: library part CMP-1753-00002-2, "3-Axis Gyroscope, Accelerometer and a Digital Motion Processor(TM) (DMP), 2.375 to 3.46 V, -40 to 85 degC, 24-Pin QFN, RoHS, Tape and Reel", Manufacturer=InvenSense, Standard Package=5,000, Category=Sensors,Transducers, Datasheet URL=http://datasheet.octopart.com/MPU-6050-InvenSense-datasheet-14421344.pdf, Datasheet Version="Rev. 3.3, 05/2012", Dynamic Catalog=MPU-6000™Series, Family=Multifunction, Featured Product=MPU-60506-Axis,IntegratedI²CSolution, Manufacturer URL=http://www.invensense.com/, Online Catalog=MPU-6000™Series, Other Names="1428-1007-2 / MPU6050", Output Type=Digital, Sensor Type=MotionTracking, Unit PriceUSD=Digital
U3: "17V Clamp 5A (8/20Âµs) Ipp Tvs Diode Surface Mount SOT-23-6", Package="SOT-23-6 STMicroelectronics", Availability="In Stock", Check_prices=https://www.snapeda.com/parts/USBLC6-2SC6/STMicroelectronics/view-part/?ref=eda, MF=STMicroelectronics, MP=USBLC6-2SC6, Price=None, Purchase-URL=https://pricing.snapeda.com/search/part/USBLC6-2SC6/?ref=eda, SnapEDA_Link=https://www.snapeda.com/parts/USBLC6-2SC6/STMicroelectronics/view-part/?ref=snap
U4: library part CMP-0243-00165-1, "ARM Cortex-M4 32-bit MCU+FPU, 512 KB Flash, 128 KB RAM, 36 I/Os, 48-Pin UFQFPN, -40 to 85 degC, Tray", I/Os (High Current)=36, Operating Frequency(F) (Processor speed) (MHz)=100, Package Description=UFQFPN48, Package Reference="48-Pin Ultra Thin Fine Pitch Quad Flat No-Lead, 7 x 7 x 0.6 mm Body, 0.5 mm Pitch, Exposed Pad", Supply Voltage(Vcc) min (V)=1.7, ComponentLink1Description="Manufacturer URL", ComponentLink1URL=http://www.st.com/, ComponentLink2Description=Datasheet, ComponentLink2URL=http://www.st.com/st-web-ui/static/active/en/resource/technical/document/datasheet/DM00115249.pdf, Core="ARM Cortex-M4", DatasheetVersion="Rev. 6", FLASH Size (Prog) (kB)=512, Internal RAM Size (kB)=128, Mounting Technology="Surface Mount", Packing=Tray
X1: library part "Aker  C5S-16.000-12-3030-X", "Aker S5C SMT Crystal", Frequency Stability=+/-30ppm, Load Capacitance=12pF, Manufacturer=Aker, Manufacturer Part #=C5S-16.000-12-3030-X, Package="3.2x5mm SMD", Creator="R Kanjee", HelpURL=http://za.rs-online.com/web/p/crystal-units/6719488/, RS="RS 671-9488", RS Stock Nr.=671-9488, Supplier=RS

## Via types
v1: diameter 0.9, hole 0.4, L1(signal) to L4(signal), 39 vias
v2: diameter 0.5, hole 0.2, L1(signal) to L4(signal), 29 vias

## Nets (pads, with @x,y where several pads share a name; then routed paths per layer and width w, separated by ;. In a path a pad name is that pad's centre, name@x,y a point inside that pad or via, vN(x,y) a via of type N, cw(c..) or ccw(c..) an arc to the next point about the centre after c; other vN are vias at no path point)
+3V3: C5.1 C6.2 C8.2 C10.2 C16.2 C17.2 C19.2 C20.2 C21.2 C22.2 C23.2 D2.A FB2.1 J2.6 J3.6 R2.2 R3.2 R5.2 U1.2 U1.4 U2.8 U2.13 U4.1 U4.24 U4.36 U4.48 | length 140.8
  L1(signal) w0.2: C23.2 20.733,31.95 22.55,31.95 23.038,31.462 23.498,31.462 U4.1 ; 21.265,34.265 21.64,33.89 22.86,33.89 24.156,32.594 U4.48 ; U4.36 31.133,31.454 31.25,31.571 31.25,32.5 ; v1(31,23.5) 30.866,23.634 30.866,24.007 30.739,24.134 30.551,24.134 29.672,25.013 29.672,25.288 U4.24 32.446,25.304 33.5,24.25 ; v1(45.25,43.25) U2.8 ; 46.5,39.25 47.25,40 47.25,40.133 47.367,40.25 47.675,40.25 47.75,40.325 U2.13
  L1(signal) w0.3: 21.25,33 v1(22.75,33) ; 31.25,32.5 31.75,33 31.75,32.912 32.25,32.412 v1(32.25,32.25) ; 45.75,38.5 46.5,39.25
  L1(signal) w0.4: 31.75,33 32,33.25 ; 33.5,24.25 36.5,24.25 ; 45.25,38 45.75,38.5
  L1(signal) w0.5: R5.2 13.795,27.54 13.585,27.75 FB2.1 10.575,26.075 10.25,25.75 7.75,25.75 6.75,26.75 6.75,32.5 9.75,35.5 14,35.5 14.25,35.25 ; C16.2 C16.2@14.151,32.563 ; C17.2@17.199,32.563 C17.2 ; 21.625,35.125 21.625,37.25 ; R2.2 22.045,38.795 21.625,38.375 21.625,37.25 ; R3.2 21.625,37.25 ; 32,33.25 32.793,34.043 33.918,34.043 34.298,34.423 36.173,34.423 v1(36.25,34.5) ; 36.5,24.25 36.625,24.125 C20.2 ; v1(40,34.5) 41.75,34.5 45,37.75 ; v1(42.25,39.75) 43.288,38.712 44.038,38.712 45,37.75 ; 45.25,38 45,37.75 ; v1(45.25,43.25) 45.25,45 45.75,45.5 45.75,48.875 C10.2 ; C5.1 56.1,49.375 59.018,52.293 59.207,52.293 59.25,52.25 64.582,52.25 64.875,51.957 C6.2 U1.4 76.022,48.523 76.022,53.728 D2.A
  L4(signal) w0.2: v1(42.25,39.75) 43.703,41.203 43.703,41.703 v1(45.25,43.25)
  L4(signal) w0.3: v1(22.75,33) 26.5,33 27,33.5 31,33.5 v1(32.25,32.25) 32.25,24.5 31.807,24.057 31.715,24.057 31.158,23.5 v1(31,23.5)
  L4(signal) w0.5: v1(36.25,34.5) v1(40,34.5)
+3V3A: C18.2 FB2.2 U4.9 | length 24.9
  L1(signal) w0.2: v1(22,24) 21.961,24.039 21.961,24.883 22.078,25 22.25,25 22.856,25.606 22.856,27.109 23.076,27.329 23.092,27.329 23.217,27.454 U4.9
  L1(signal) w0.5: C18.2 10.65,30.75 8.925,29.025 FB2.2 9.05,27.75 10.24,28.94 17.952,28.94 18.392,28.5 v1(18.5,28.5)
  L4(signal) w0.5: v1(18.5,28.5) 18.5,26.75 19.712,25.538 19.995,25.538 20.5,25.034 21.075,25.034 22,24.108 v1(22,24)
+5V: C2.2 C3.2 C4.2 FB1.2 U1.3 | length 1.1
  L1(signal) w0.5: C2.2 C2.2@66,42.875 ; C2.2@65.875,43.1 C2.2@66.275,43.5 ; C3.2@66,40.125 C3.2 C3.2@66.1,39.975 ; C4.2@66.1,34.775 C4.2 ; FB1.2@66.1,37.225 FB1.2 FB1.2@66.1,37.275
GND: C1.1 C2.1 C3.1 C4.1 C5.2 C6.1 C7.1 C8.1 C9.1 C10.1 C11.2 C12.2 C13.1 C14.2 C15.1 C16.1 C17.1 C18.1 C19.1 C20.1 C21.1 C22.1 C23.1 D1.1 J1.5 J2.1 J3.1 R1.2 R4.2 R6.1 U1.1 U2.1 U2.9 U2.11 U2.18 U2.25 U3.2 U4.8 U4.23 U4.35 U4.47 U4.49 X1.2 X1.3 | length 105.3
  L1(signal) w0.2: U4.8 24.356,27.954 v2(24.706,27.604) ; U4.47 24.656,30.954 v2(24.706,30.904) ; v2(29.106,26.504) 29.156,26.454 U4.23 29.156,24.344 29.5,24 ; v2(29.106,30.904) 29.156,30.954 U4.35 31.704,30.954 ; U2.11 48.25,41.75 v2(48.45,41.95) ; U2.9 48.15,42.75 v2(48.45,43.05) ; U2.25@49.55,41.9 50.175,41.275 50.175,40.925 50.175,40.575 U2.18 ; v2(49.55,43.05) 50.2,43.7 50.2,44.45 U2.1 ; 73.75,32.75 76.29,32.75 J1.5
  L1(signal) w0.3: 29.5,24 29.75,23.75 ; 31.704,30.954 31.75,31 32.75,31 ; v1(58,32.75) 58,31.219 58.664,30.555 58.685,30.555 58.94,30.3 U3.2 ; 70.681,32.207 73.207,32.207 73.75,32.75
  L1(signal) w0.4: 29.75,23.25 29.75,23.75 ; 69,32.207 70.681,32.207
  L1(signal) w0.5: v1(8.5,32.25) 8.608,32.25 8.858,32.5 C18.1 ; C12.2@12.337,18.462 15.938,18.462 18.05,16.35 X1.2 21.35,16.35 22,17 22,21.025 20.875,22.15 C14.2 ; C12.2@12.437,18.462 12.75,18.775 12.75,18.875 14,20.125 14,21.5 v1(12.5,23) 12.577,23.077 12.577,23.477 14,24.9 C15.1 ; C16.1@13.796,30.586 C16.1 C16.1@14.151,30.814 ; C17.1@17.199,30.814 C17.1 ; C22.1 v1(19,39.5) ; R6.1 v1(27.5,48.25) ; 29.75,23.25 29.75,22.775 30.65,21.875 C13.1 C13.1@30.85,21.875 ; 32.75,31 33.5,31 34,31.5 C21.1 ; C20.1@34.5,22.125 C20.1 ; R4.2 41.478,26.228 41.478,24.272 v1(41.5,24.25) ; v1(41.5,49.25) C10.1 43.625,46 C9.1 ; C8.1 49.813,48.813 51.687,48.813 v1(51.75,48.75) ; C1.1 58.925,34.875 D1.1 60.2,34.75 C4.1 64.75,34.375 64.75,33.25 65.793,32.207 69,32.207 v1(69,33.5) ; C5.2@55.5,47.225 55.9,47.625 C5.2 ; v1(59,23.75) C11.2 ; C6.1@62.725,48.9 C6.1 ; v1(62.75,40) C3.1 64.25,40.125 64.25,42.875 C2.1 ; v1(67.5,50.75) 67.52,50.77 69.435,50.77 U1.1 69.5,50.835 69.5,53.705 R1.2
  other v2: 24.706,26.504 25.806,26.504 26.906,26.504 28.006,26.504 25.806,27.604 26.906,27.604 28.006,27.604 29.106,27.604 24.706,28.704 25.806,28.704 26.906,28.704 28.006,28.704 29.106,28.704 24.706,29.804 25.806,29.804 26.906,29.804 28.006,29.804 29.106,29.804 25.806,30.904 26.906,30.904 28.006,30.904 49.55,41.95
LED: D2.C R1.1 | length 2.7
  L1(signal) w0.5: R1.1 D2.C
LED_A: D3.A U4.26 | length 4.5
  L1(signal) w0.2: U4.26 31.454,26.454 31.5,26.5
  L1(signal) w0.3: 31.5,26.5 32.75,26.5
  L1(signal) w0.5: 32.75,26.5 33,26.25 D3.A
LED_C: D3.C R4.1 | length 3
  L1(signal) w0.5: D3.C R4.1
MCU_BOOT0: R6.2 U4.44 | length 14.7
  L1(signal) w0.2: v1(25.75,33.75) 25.75,33.561 26.131,33.179 26.131,32.929 26.156,32.905 U4.44 ; R6.2 27.5,41.313 29,39.813 v1(29,37.5)
  L4(signal) w0.2: v1(25.75,33.75) 27.317,35.317 27.567,35.317 29,36.75 v1(29,37.5)
MCU_NRST: C15.2 J2.2 R5.1 U4.7 | length 50.7
  L1(signal) w0.2: v1(20,24) 20.134,24.134 20.134,24.723 20.25,24.839 20.25,25.223 20.083,25.391 20.083,26.425 21.408,27.75 22.24,27.75 ; v1(21.5,26.25) 22.24,26.99 22.24,27.75 ; U4.7 22.944,28.454 22.24,27.75
  L1(signal) w0.3: C15.2 15.705,25.045 R5.1 16.5,27.5 18,26 18,24.912 17.5,24.412 v1(17.5,24.25)
  L4(signal) w0.2: J2.2 20.81,26.94 v1(21.5,26.25)
  L4(signal) w0.3: v1(17.5,24.25) 18.693,24.25 18.943,24 v1(20,24)
MCU_OSC_IN: C12.1 U4.5 X1.1 | length 27.7
  L1(signal) w0.2: X1.1 12.525,16.35 C12.1 12.15,16.625 11.2,17.575 11.2,24.024 13.226,26.05 13.852,26.05 14.555,26.753 14.555,27.786 15.209,28.44 16.201,28.44 17.391,27.25 19.255,27.25 20.755,28.75 22.25,28.75 22.929,29.429 23.481,29.429 U4.5
MCU_OSC_OUT: C14.1 U4.6 X1.4 | length 13.1
  L1(signal) w0.2: C14.1@19.125,22.15 19.95,21.325 X1.4@20,19 ; C14.1 19.125,25.135 19.2,25.21 19.2,25.79 19.125,25.865 19.125,26.375 21,28.25 22.245,28.25 22.849,28.854 22.854,28.854 22.954,28.954 U4.6
MCU_SWCLK: J2.4 U4.37 | length 29.5
  L1(signal) w0.2: U4.37 32.25,34.698 32.25,39
  L1(signal) w0.3: J2.4 28.73,55.02 33.5,50.25 33.5,40.25 32.25,39
MCU_SWDIO: J2.5 U4.34 | length 36
  L1(signal) w0.2: U4.34 36.954,30.454 37,30.5
  L1(signal) w0.3: J2.5 35,55.69 35,44.5 37,42.5 37,30.5
MCU_SWO: J2.3 U4.39 | length 29.8
  L1(signal) w0.2: U4.39 28.656,32.393 28.781,32.517 28.781,32.534 29.001,32.754 29.306,32.754 30.75,34.198 30.75,34.25
  L1(signal) w0.3: J2.3 31.25,51.52 31.25,34.75 30.75,34.25
MCU_VCAP1: C13.2 U4.22 | length 7.1
  L1(signal) w0.2: 28.656,22.656 U4.22
  L1(signal) w0.3: 28.656,22.656 28.656,20.344 28.875,20.125 C13.2
MPU_CPOUT: C7.2 U2.20 | length 4.7
  L1(signal) w0.2: U2.20 54.025,41.75 55.15,42.875 C7.2
MPU_INT: U2.12 U4.45 | length 30.4
  L1(signal) w0.2: U4.45 25.656,32.393 25.531,32.518 25.531,32.534 25.311,32.754 25.006,32.754 24.25,33.51 24.25,35.794 24.367,35.911 27.339,35.911 28.17,35.08 28.67,35.08 v1(28.75,35) ; v1(45.5,41.25) 45.75,41.25 U2.12
  L4(signal) w0.2: v1(28.75,35) 30.317,36.567 30.317,36.817 31.5,38 42.25,38 v1(45.5,41.25)
MPU_REGOUT: C9.2 U2.10 | length 5.7
  L1(signal) w0.2: C9.2 43.25,43.875 43.25,42.367 43.367,42.25 U2.10
MPU_SCL: R2.1 U2.23 U4.42 | length 51.4
  L1(signal) w0.2: v1(26.25,42) 24.975,40.725 24.314,40.725 23.955,40.366 R2.1 23.955,40.134 24.314,39.775 26.475,39.775 27.75,38.5 27.75,36.617 27.867,36.5 29.49,36.5 30.45,35.54 30.45,34.96 29.04,33.55 28.297,33.55 27.281,32.534 27.281,32.518 27.156,32.393 U4.42 ; v1(47.5,47.25) 51.495,47.25 53.1,45.645 53.1,44.921 51.504,43.325 51.05,43.325 U2.23
  L4(signal) w0.2: v1(26.25,42) 31.75,47.5 39.405,47.5 39.655,47.25 v1(47.5,47.25)
MPU_SDA: R3.1 U2.24 U4.43 | length 41.4
  L1(signal) w0.2: v1(23.25,35) 23.153,35.097 23.153,35.263 24.91,37.02 R3.1 25.16,37.5 v1(26.75,37.5) ; v1(25.5,35) 26.377,35 26.656,34.721 U4.43 ; v1(47.5,46) 50,46 50.975,45.025 U2.24
  L4(signal) w0.2: v1(23.25,35) v1(25.5,35) ; v1(26.75,37.5) 26.75,39 33.75,46 v1(47.5,46)
PA4: J3.2 U4.14 | length 21.5
  L1(signal) w0.2: 23.5,22.75 24.656,23.906 U4.14
  L1(signal) w0.3: J3.2 20.25,6.06 20.25,12 23.5,15.25 23.5,22.75
PA5: J3.3 U4.15 | length 19.8
  L1(signal) w0.2: 24.5,21.5 25.156,22.156 U4.15
  L1(signal) w0.3: 24.5,21.5 24.5,5.77 J3.3
PA6: J3.4 U4.16 | length 20.7
  L1(signal) w0.2: U4.16 25.656,22.594 26.25,22
  L1(signal) w0.3: 26.25,22 26.25,7.98 J3.4
PA7: J3.5 U4.17 | length 22.2
  L1(signal) w0.2: U4.17 26.156,23.344 27.5,22
  L1(signal) w0.3: 27.5,22 27.5,14.25 32.44,9.31 J3.5
USB_FUSE: C1.2 D1.2 F1.2 FB1.1 | length 17.3
  L1(signal) w0.3: F1.2 50.6,35.6 51.625,36.625 C1.2 ; C1.2@54.1,36.625 57.225,39.75 D1.2 ; D1.2@59.5,39.65 61.9,37.25 FB1.1
USB_IN_N: J1.2 U3.3 | length 21.2
  L1(signal) w0.26: U3.3 59.56,31.25 60.278,30.532 67.417,30.532 69.565,28.383 73.348,28.383 73.5,28.536 73.5,31.098 73.652,31.25 75.179,31.25 75.534,30.895 75.628,30.895 75.678,30.845 76.245,30.845 J1.2
USB_IN_P: J1.3 U3.1 | length 23.7
  L1(signal) w0.26: U3.1 59.56,29.35 60.278,30.068 67.225,30.068 69.373,27.92 77.316,27.92 77.48,28.084 77.48,30.921 77.096,31.305 76.435,31.305 J1.3
USB_OUT_N: U3.4 U4.32 | length 32.1
  L1(signal) w0.26: U4.32 30.571,29.454 30.589,29.472 43.273,29.472 44.543,28.201 57.622,28.201 58.365,28.944 58.365,29.935 57.05,31.25 U3.4
USB_OUT_P: U3.6 U4.33 | length 30.3
  L1(signal) w0.26: U4.33 30.571,29.954 30.589,29.936 43.464,29.936 44.735,28.665 57.43,28.665 57.902,29.136 57.902,29.681 57.749,29.834 57.534,29.834 57.05,29.35 U3.6
VBUS: C11.1 F1.1 J1.1 U3.5 | length 59.5
  L1(signal) w0.2: 53.8,30.3 U3.5 ; 74.75,30.5 75.321,30.5 75.546,30.275 75.7,30.275 75.875,30.1 J1.1
  L1(signal) w0.3: 52.45,30.3 53.8,30.3 ; 74.25,30.5 74.75,30.5
  L1(signal) w0.4: v1(51.25,31.75) 50,30.5 50,30.3 52.45,30.3 ; C11.1 57.25,26.15 56.8,25.7 56.7,25.7 56.5,25.5 v1(53.75,25.5) 58,21.25 v1(73.75,21.25) v1(73.75,24.75) ; 74.25,30.5 74.25,29.72 74.404,29.565 74.404,28.846 v1(74.5,28.75)
  L1(signal) w0.5: F1.1 46.4,33.9 50,30.3
  L4(signal) w0.4: v1(51.25,31.75) 53.75,29.25 v1(53.75,25.5) ; v1(73.75,24.75) 73.75,28 v1(74.5,28.75)
pads on no net: J1.4 J1.6 J1.7 J1.8 J1.9 J1.10 J1.11 MHNP1.MHNP3P2MM MHNP2.MHNP3P2MM MHNP3.MHNP3P2MM MHNP4.MHNP3P2MM U2.2 U2.3 U2.4 U2.5 U2.6 U2.7 U2.14 U2.15 U2.16 U2.17 U2.19 U2.21 U2.22 U4.2 U4.3 U4.4 U4.10 U4.11 U4.12 U4.13 U4.18 U4.19 U4.20 U4.21 U4.25 U4.27 U4.28 U4.29 U4.30 U4.31 U4.38 U4.40 U4.41 U4.46 X1.5

## Polygon pours and split planes (outlines as drawn)
GND on L1(signal) "GND" (solid, pour order 13): 57.5,47 57.5,43.75 57.25,44 54,44 54,47.25
GND on L1(signal) "GND" (solid, pour order 12): 49,49.5 52,49.5 53.25,48.25 57,48.25 57.25,48 61,48 62,49 62,49.25 63.25,49.25 63.5,49.5 63.75,49.25 63.75,47 51.25,47 50.5,47.75 49,47.75 49,48.75
+5V on L1(signal) "+5V" (solid, pour order 11): 68.5,47 70.25,47 70.25,45 69,43.75 67,43.75 67,42 66.75,41.75 67.25,41.25 67.25,38.75 67,38.5 67,36 67.25,35.75 67.25,33.75 67,33.5 65.5,33.5 65.5,33.75 65.25,34 65.25,36.5 65.5,36.75 65.5,38.5 65.25,38.75 65.25,43.75 65.5,44 65.5,44.5 65.75,44.5 66.75,45.5 67.5,45.5 68.5,46.5 68.5,46.75
+3V3 on L1(signal) "+3V3" (solid, pour order 10): 35,58.5 35.25,58.25 35.25,56.75 37.25,56.75 42.5,51.5 43,51.25 44.75,50 44.75,48.25 47,48.25 47,49.5 47.25,49.75 52.75,49.75 53.5,49 54.75,49 55,48.75 57.5,48.75 58,49.25 57.75,49.5 57.75,50.75 54,50.75 53.25,51.5 50.25,51.5 50,51.75 45.75,51.75 45.5,52 44.25,52.5 43.5,52.75 42.25,54 42.25,54.25 36.75,59.75 35.75,59.75 35.25,59.25
+3V3 on L1(signal) "+3V3" (solid, pour order 8): 36,23.25 37.75,23.25 37.75,4 35,4 34.75,4.25 34.75,16 35.75,17 36,17 36,18.75
GND on L1(signal) "GND" (solid, pour order 7): 32.625,21.25 32.625,17.875 32.75,17.75 35.5,17.75 35.5,21.25
GND on L1(signal) "GND" (solid, pour order 5): 35.5,23.25 35.5,21.25 29.75,21.25 29.75,22.775
GND on L1(signal) "GND" (solid, pour order 2): 22,31.5 22,30 21.5,29.5 13,29.5 12,30.5 12,31.5 10,31.5 9.5,32 9.5,33.25 10.5,33.75 11.25,33.75 11.75,33.75 11.75,32.75 12.5,32 12.5,31.75 18.25,31.75 18.5,31.5 21.5,31.5
+3V3 on L1(signal) "+3V3" (solid, pour order 0): 18,40.125 18,36.125 18.25,35.875 21.5,35.875 21.75,35.625 21.75,31.875 12.75,32.125 12.5,34.125 14,40.125
GND on l2(GND) "GND" (solid, pour order 3): 3.25,61.75 80,61.75 80,4.5 78,2.5 2.75,2.5
GND on l3(GND) "GND" (solid, pour order 4): 3.25,61.75 78.75,61.75 79,62 80.25,60.75 79.75,2.75 2.5,2.5

## Silkscreen, mask and mechanical layers (free items; w line width, h text height)
Top Overlay:
  text "+3V3" at 39.754,59.496 h1 r270
  text "GND" at 15.254,53.004 h0.8
  text "NRST" at 19.004,53.004 h0.8
  text "SWO" at 23.254,53.004 h0.8
  text "SWCLK" at 26.504,53.004 h0.8
  text "SWDIO" at 31.004,53.004 h0.8
  text "PA4" at 19.004,10.004 h1
  text "PA5" at 23.004,10.004 h1
  text "PA6" at 27.504,10.004 h1
  text "PA7" at 32.004,10.004 h1
  text "+3V3" at 35.754,10.004 h1
  text "GND" at 13.246,6.504 h1 r90
  text "ENG.NEO" at 60.004,4.254 h2
Bottom Overlay:
  text "STM32 MCU WITH MPU SENSOR" at 77.996,13.504 h2
Mechanical 1:
  lines w0.635: 1.5,4.414 ccw(c4.914,4.414) 4.914,1 5.75,1 76.518,1 ccw(c76.518,5.232) 80.75,5.232 80.75,59.775 ccw(c77.525,59.775) 77.525,63 15.75,63 5.732,63 ccw(c5.732,58.768) 1.5,58.768 1.5,4.414